# Altium PCB Programmer.PcbDoc
Units mm, origin at the board's own origin, x right, y up, seen from the top; angles counter-clockwise.
Board outline 93 x 32 mm, 2 copper layers (Top Layer, Bottom Layer); 2 components, 6 nets, 49 pads, 4 vias.
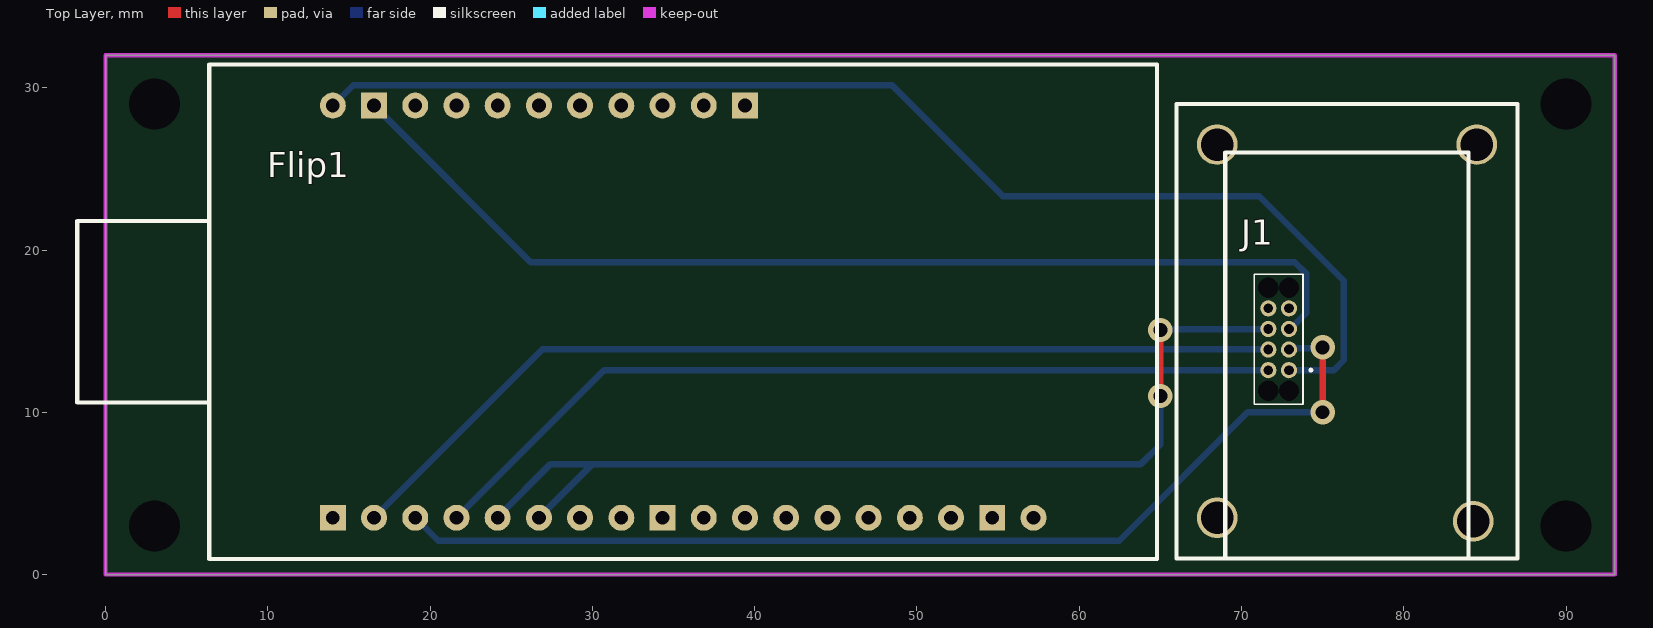
[diagram p0: Top Layer view]
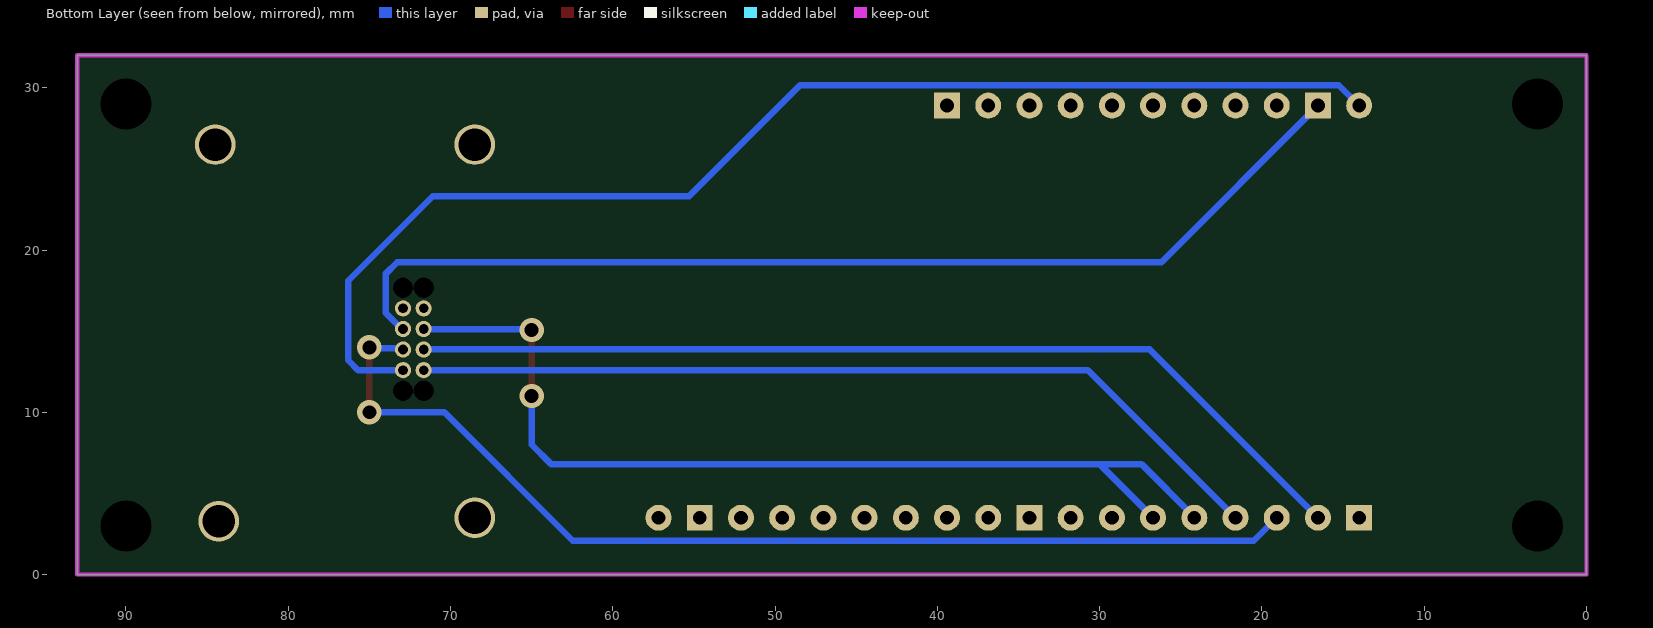
[diagram p1: Bottom Layer view, seen from below]

## Layer stack, top to bottom
Top Solder: solder mask 0.0102, Solder Resist, Dk 3.5
Top Layer: signal copper 0.0356
Dielectric 1: dielectric 0.32, FR-4, Dk 4.8
Bottom Layer: signal copper 0.0356
Bottom Solder: solder mask 0.0102, Solder Resist, Dk 3.5

## Board outline
0,0 0,32 93,32 93,0

## Design rules (kind name [scope] priority, off if disabled: settings)
Clearance Clearance_1 [All] p1: gap=0.254 ignorepadtopadclearanceinfootprint=FALSE except(0: Arc-Hole Track-Hole SMDPad-Hole THPad-Hole Via-Hole Fill-Hole Poly-Hole Region-Hole Text-Hole)
Clearance [All] p2: gap=0.254 ignorepadtopadclearanceinfootprint=FALSE except(0: Arc-Hole Track-Hole SMDPad-Hole THPad-Hole Via-Hole Fill-Hole Poly-Hole Region-Hole Text-Hole)
HoleSize [All] p1: absolutevalues=TRUE maxlimit=3.5 minlimit=0.025 maxpercent=80.000 minpercent=20.000
PolygonConnect [All] p1: connectstyle=Relief reliefconductorwidth=0.254 reliefentries=4 polygonreliefangle="90 Angle" airgapwidth=0.254
RoutingVias [All] p1: holewidth=0.711 width=1.27 viastyle="Through Hole" minholewidth=0.711 minwidth=1.27 maxholewidth=0.711 maxwidth=1.27
SolderMaskExpansion [All] p1: expansion=0.102 istentingtop=FALSE
Width [All] p1: maxlimit=0.4 minlimit=0.1 preferedwidth=0.3
29 further rules are at their usual default settings.

## Components (designator, comment, footprint, x,y, rotation, side; value= is the part's Value field where it differs from the comment)
Flip1 "AVR_Flip" AVR_Flip 14,3.5 r90 top
J1 "Programming Connector" Programmer 72.925,12.595 r90 top locked

## Footprints (in the part's own frame and the unit in brackets; to place one, negate y for a bottom-side part, rotate by r counter-clockwise, add the part's x,y. Pads: shape width x height; smd on the part's side, far side on the other; paste and mask are expansions set on the pad)
AVR_Flip [mm]
  round 1.6 hole 0.85: 0(25.4,0) 2(25.4,-5.08) 3(25.4,-7.62) 4(25.4,-10.16) 5(25.4,-12.7) 6(25.4,-15.24) 7(25.4,-17.78) 8(25.4,-20.32) 9(25.4,-22.86) 11(0,-43.18) 13(0,-38.1) 14(0,-35.56) 15(0,-33.02) 16(0,-30.48) 17(0,-27.94) 18(0,-25.4) 19(0,-22.86) 21(0,-17.78) 22(0,-15.24) 23(0,-12.7) 24(0,-10.16) 25(0,-7.62) 26(0,-5.08) 27(0,-2.54)
  rect 1.6x1.6 hole 0.85: 1(25.4,-2.54) 10(25.4,-25.4) 12(0,-40.64) 20(0,-20.32) 28(0,0)
  silkscreen extent -2.54,-50.8 27.94,15.75
Programmer [mm]
  round 1 hole 0.6: 1(0,0) 2(0,1.27) 3(1.27,0) 4(1.27,1.27) 5(2.54,0) 6(2.54,1.27) 7(3.81,0) 8(3.81,1.27)
  round 0.62 hole 1.25 unplated: MH1(-1.26,0) MH2(-1.26,1.27) MH3(5.08,0) MH4(5.08,1.27)
  silkscreen extent -2.09,-1.4 5.91,2.13, body extent -2.09,-0.86 5.91,2.13, height 6.37

## Part data
J1: "Connector", Manufacturer_Name=Mill-Max, Manufacturer_Part_Number=855-22-008-10-001101, Mouser Part Number=575-855-22-008-10, Datasheet Link=https://componentsearchengine.com/Datasheets/2/855-22-008-10-001101.pdf, Height=6.27mm, Mouser Price/Stock=https://www.mouser.co.uk/ProductDetail/Mill-Max/855-22-008-10-001101?qs=mPCt1EmoOdQMosTdRU7w4Q%3D%3D

## Free pads (board coordinates)
  round 2.5 hole 2: 6(68.5,3.5) 6(68.5,26.5) 6(84.289,3.283) 6(84.5,26.5)
  round 0 hole 3.15: 7(3,3) 7(3,29) 7(90,3) 7(90,29)

## Via types
v1: diameter 1.5, hole 0.85, Top Layer to Bottom Layer, tented both sides, 4 vias

## Nets (pads, with @x,y where several pads share a name; then routed paths per layer and width w, separated by ;. In a path a pad name is that pad's centre, name@x,y a point inside that pad or via, vN(x,y) a via of type N, cw(c..) or ccw(c..) an arc to the next point about the centre after c; other vN are vias at no path point)
GND: Flip1.1 J1.5 | length 65.6
  Bottom Layer w0.4: Flip1.1 26.187,19.253 73.279,19.253 74.004,18.528 74.004,16.135 73.004,15.135 J1.5
NetFlip1_23: Flip1.23 Flip1.24 J1.6 | length 61.1
  Top Layer w0.4: v1(65,11) v1(65,15.074)
  Bottom Layer w0.4: Flip1.24 24.16,3.551 27.416,6.807 63.805,6.807 65,8.002 v1(65,11) ; Flip1.23 26.7,3.51 29.947,6.756 ; v1(65,15.074) 65.031,15.105 71.625,15.105 J1.6
NetFlip1_25: Flip1.25 J1.2 | length 53.9
  Bottom Layer w0.4: Flip1.25 30.715,12.595 J1.2 71.67,12.595 J1.2@71.712,12.636
NetFlip1_26: Flip1.26 J1.3 | length 65.9
  Top Layer w0.4: v1(75,10) v1(75,14)
  Bottom Layer w0.4: Flip1.26 20.497,2.083 62.459,2.083 70.376,10 v1(75,10) ; J1.3 72.993,13.933 74.933,13.933 v1(75,14)
NetFlip1_27: Flip1.27 J1.4 | length 59.3
  Bottom Layer w0.4: Flip1.27 26.91,13.87 J1.4@71.517,13.87
VCC: Flip1.0 J1.1 | length 76.3
  Bottom Layer w0.4: Flip1.0 15.254,30.154 48.459,30.154 55.296,23.317 71.095,23.317 76.3,18.112 76.3,13.2 75.695,12.595 J1.1
pads on no net: Flip1.2 Flip1.3 Flip1.4 Flip1.5 Flip1.6 Flip1.7 Flip1.8 Flip1.9 Flip1.10 Flip1.11 Flip1.12 Flip1.13 Flip1.14 Flip1.15 Flip1.16 Flip1.17 Flip1.18 Flip1.19 Flip1.20 Flip1.21 Flip1.22 Flip1.28 J1.7 J1.8 J1.MH1 J1.MH2 J1.MH3 J1.MH4

## Keep-outs
Keep-Out Layer:
  the board outline again, w0.254

## Silkscreen, mask and mechanical layers (free items; w line width, h text height)
Top Overlay:
  lines w0.254: 69,1 69,26 84,26 84,1 ; 66,1 66,29 87,29 87,1 66,1